# Altium PCB LED_Ring.PcbDoc
Units mm, origin at the board's own origin, x right, y up, seen from the top; angles counter-clockwise.
Board outline 152.4 x 101.6 mm, 2 copper layers (Top Layer, Bottom Layer); 55 components, 28 nets, 136 pads, 70 vias.
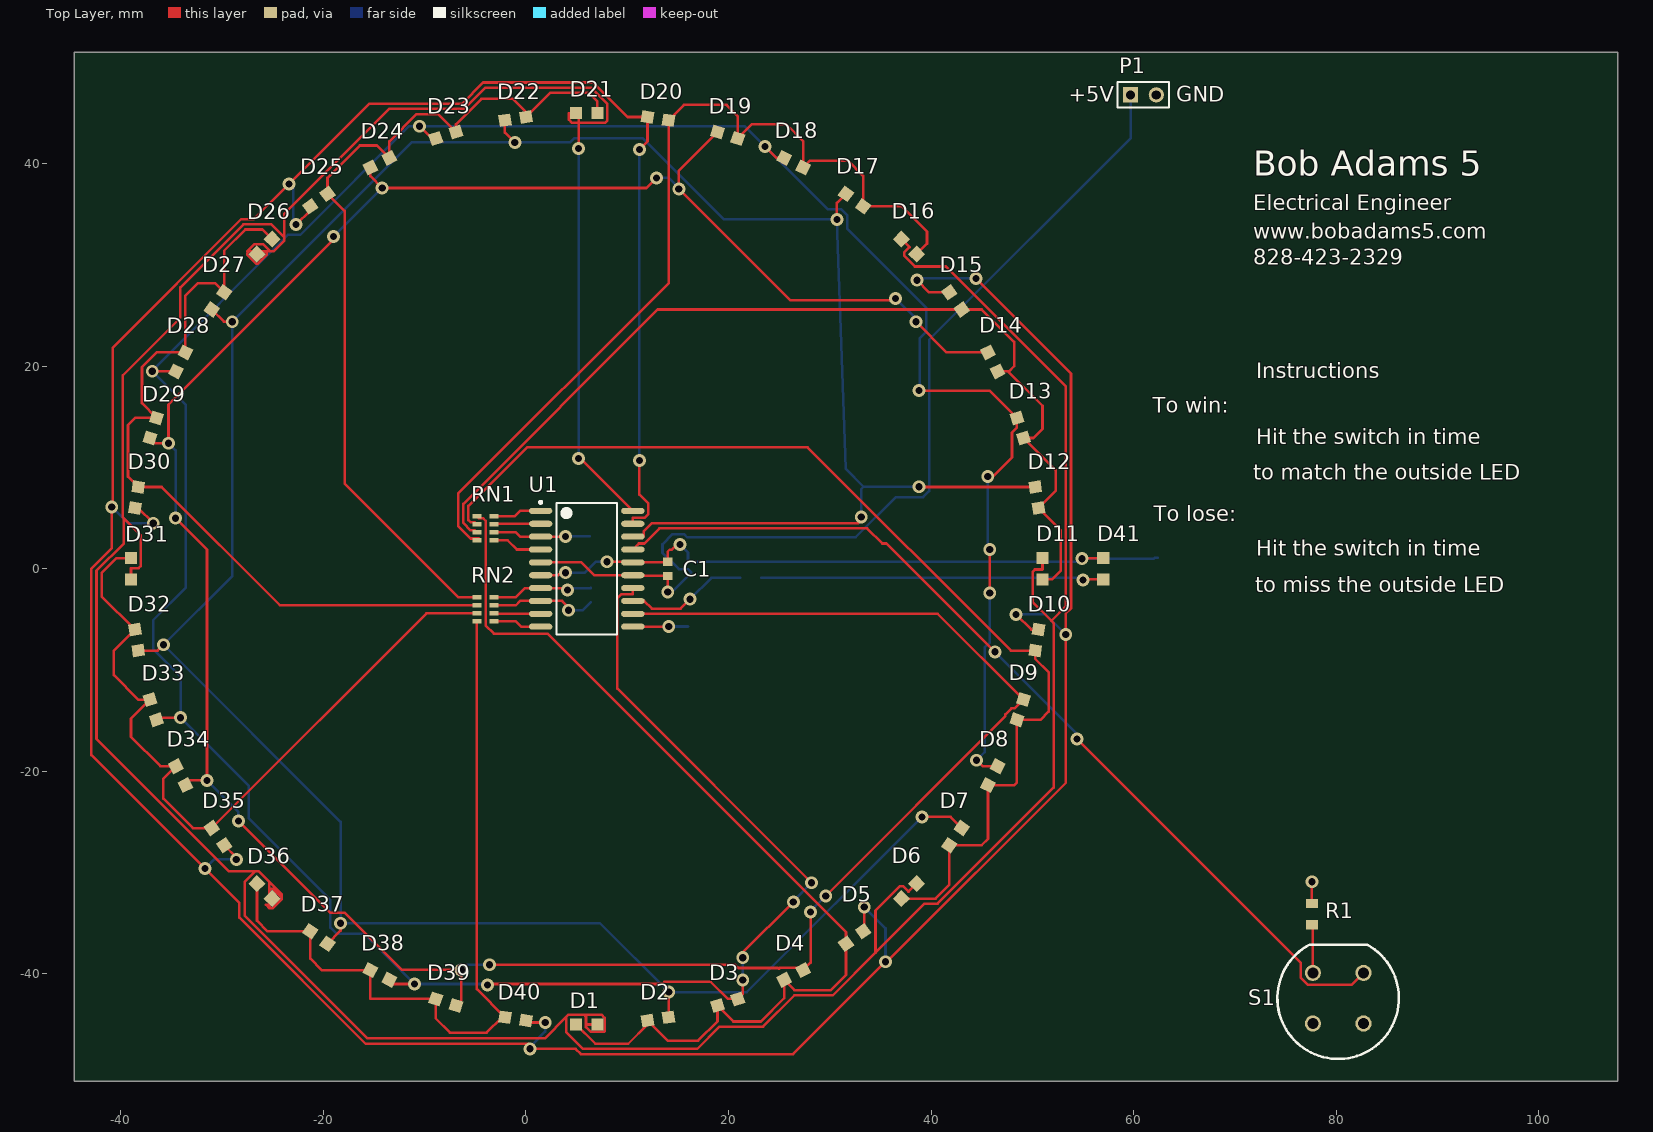
[diagram p0: Top Layer view]
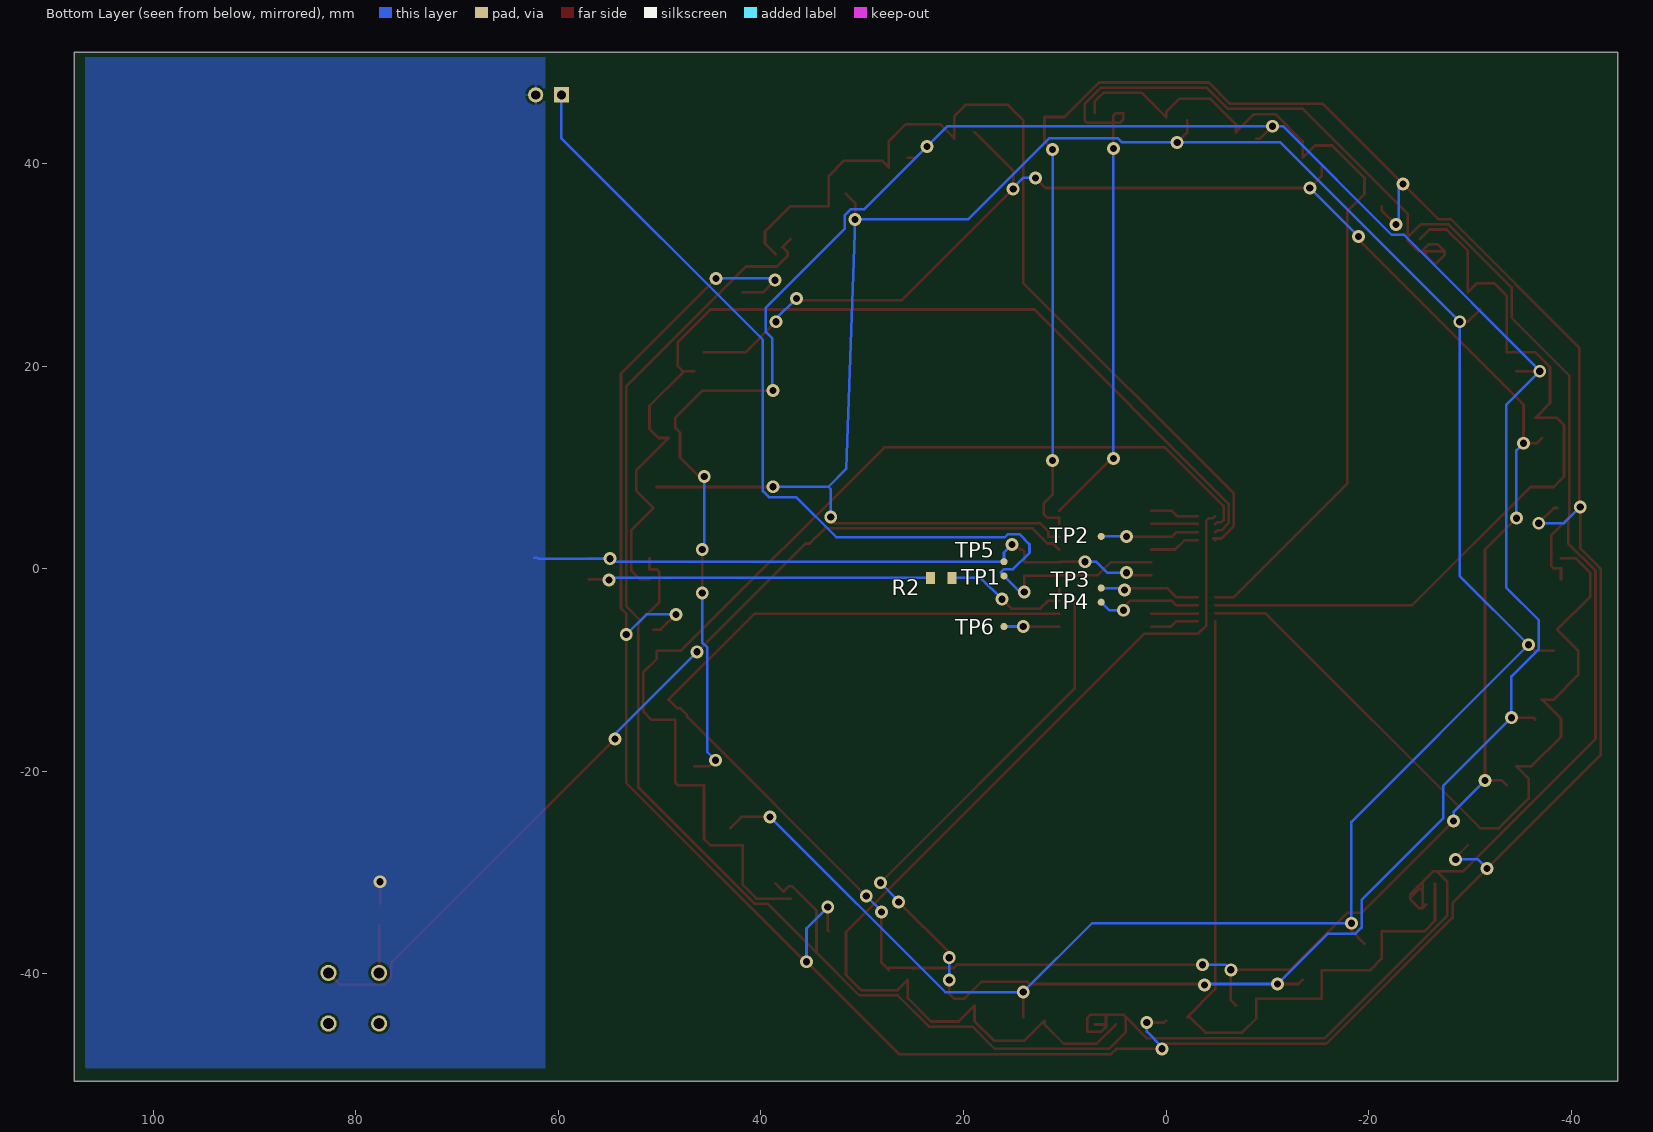
[diagram p1: Bottom Layer view, seen from below]

## Layer stack, top to bottom
Top Solder: solder mask 0.0102, Solder Resist, Dk 3.5
Top Layer: signal copper 0.0356
Dielectric 1: dielectric 0.32, FR-4, Dk 4.8
Bottom Layer: signal copper 0.0356
Bottom Solder: solder mask 0.0102, Solder Resist, Dk 3.5

## Board outline
-44.6,-50.6 107.8,-50.6 107.8,51 -44.6,51

## Design rules (kind name [scope] priority, off if disabled: settings)
Clearance [All] p1: gap=0.254
PolygonConnect [All] p1: connectstyle=Relief reliefconductorwidth=0.254 reliefentries=4 polygonreliefangle="90 Angle" airgapwidth=0.254
RoutingVias [All] p1: holewidth=0.711 width=1.27 viastyle="Through Hole" minholewidth=0.711 minwidth=1.27 maxholewidth=0.711 maxwidth=1.27
SolderMaskExpansion [All] p1: expansion=0.102
Width [All] p1: maxlimit=0.254 minlimit=0.254 preferedwidth=0.254
30 further rules are at their usual default settings.

## Components (designator, comment, footprint, x,y, rotation, side; value= is the part's Value field where it differs from the comment)
C1 "Cap Semi" 1608[0603] 14,0 r270 top
D1 "475-1410-1-ND" 0805 6,-45 r0 top
D2 "475-1410-1-ND" 0805 13.04,-44.45 r9 top
D3 "475-1410-1-ND" 0805 19.91,-42.8 r18 top
D4 "475-1410-1-ND" 0805 26.43,-40.1 r27 top
D5 "475-1410-1-ND" 0805 32.45,-36.41 r36 top
D6 "475-1410-1-ND" 0805 37.82,-31.82 r45 top
D7 "475-1410-1-ND" 0805 42.41,-26.45 r54 top
D8 "475-1410-1-ND" 0805 46.1,-20.43 r63 top
D9 "475-1410-1-ND" 0805 48.8,-13.91 r72 top
D10 "475-1410-1-ND" 0805 50.45,-7.04 r81 top
D11 "475-1410-1-ND" 0805 51,0 r90 top
D12 "475-1410-1-ND" 0805 50.45,7.04 r99 top
D13 "475-1410-1-ND" 0805 48.8,13.91 r108 top
D14 "475-1410-1-ND" 0805 46.1,20.43 r117 top
D15 "475-1410-1-ND" 0805 42.41,26.45 r126 top
D16 "475-1410-1-ND" 0805 37.82,31.82 r135 top
D17 "475-1410-1-ND" 0805 32.45,36.41 r144 top
D18 "475-1410-1-ND" 0805 26.43,40.1 r153 top
D19 "475-1410-1-ND" 0805 19.91,42.8 r162 top
D20 "475-1410-1-ND" 0805 13.04,44.45 r171 top
D21 "475-1410-1-ND" 0805 6,45 r180 top
D22 "475-1410-1-ND" 0805 -1.04,44.45 r189 top
D23 "475-1410-1-ND" 0805 -7.91,42.8 r198 top
D24 "475-1410-1-ND" 0805 -14.43,40.1 r207 top
D25 "475-1410-1-ND" 0805 -20.45,36.41 r216 top
D26 "475-1410-1-ND" 0805 -25.82,31.82 r225 top
D27 "475-1410-1-ND" 0805 -30.41,26.45 r234 top
D28 "475-1410-1-ND" 0805 -34.1,20.43 r243 top
D29 "475-1410-1-ND" 0805 -36.8,13.91 r252 top
D30 "475-1410-1-ND" 0805 -38.45,7.04 r261 top
D31 "475-1410-1-ND" 0805 -39,0 r270 top
D32 "475-1410-1-ND" 0805 -38.45,-7.04 r279 top
D33 "475-1410-1-ND" 0805 -36.8,-13.91 r288 top
D34 "475-1410-1-ND" 0805 -34.1,-20.43 r297 top
D35 "475-1410-1-ND" 0805 -30.41,-26.45 r306 top
D36 "475-1410-1-ND" 0805 -25.82,-31.82 r315 top
D37 "475-1410-1-ND" 0805 -20.45,-36.41 r324 top
D38 "475-1410-1-ND" 0805 -14.43,-40.1 r333 top
D39 "475-1410-1-ND" 0805 -7.91,-42.8 r342 top
D40 "475-1410-1-ND" 0805 -1.04,-44.45 r351 top
D41 "475-1410-1-ND" 0805 57,0 r90 top
P1 "Header 2" HDR1X2 59.7,46.8 r0 top
R1 "1k" RC0805 77.6,-34.1 r270 top
R2 "27" RC0805 22.2,-0.9 r180 bottom
RN1 "YC164J-27CT-ND" 4X0603 -4,4 r270 top
RN2 "YC164J-27CT-ND" 4X0603 -4,-4 r270 top
S1 "OFF-MOM switch, 10mA" EG4793-ND 80.2,-42.4 r0 top
TP1 "TP" TP 16,-0.7 r90 bottom
TP2 "TP" TP 6.4,3.2 r90 bottom
TP3 "TP" TP 6.4,-1.9 r90 bottom
TP4 "TP" TP 6.4,-3.3 r90 bottom
TP5 "TP" TP 16,0.7 r90 bottom
TP6 "TP" TP 16,-5.7 r90 bottom
U1 "ATtiny167-SU" 20S2_N 6,0 r0 top

## Footprints (in the part's own frame and the unit in brackets; to place one, negate y for a bottom-side part, rotate by r counter-clockwise, add the part's x,y. Pads: shape width x height; smd on the part's side, far side on the other; paste and mask are expansions set on the pad)
4X0603 [mm] "Based on Yageo 4x0603 Resistor Network"
  rect 0.45x0.9 smd: 1(-1.2,0.85) 2(-1.2,-0.85) 3(-0.4,0.85) 4(-0.4,-0.85) 5(0.4,0.85) 6(0.4,-0.85) 7(1.2,0.85) 8(1.2,-0.85)
20S2_N [mm] "SOIC, 20-Leads, Body 12.8x7.5mm, Pitch 1.27mm, IPC Medium Density"
  oval 2.3x0.6 smd: 1(-4.55,5.715) 2(-4.55,4.445) 3(-4.55,3.175) 4(-4.55,1.905) 5(-4.55,0.635) 6(-4.55,-0.635) 7(-4.55,-1.905) 8(-4.55,-3.175) 9(-4.55,-4.445) 10(-4.55,-5.715) 11(4.55,-5.715) 12(4.55,-4.445) 13(4.55,-3.175) 14(4.55,-1.905) 15(4.55,-0.635) 16(4.55,0.635) 17(4.55,1.905) 18(4.55,3.175) 19(4.55,4.445) 20(4.55,5.715)
  silkscreen extent -4.67,-6.5 3,6.69, body extent -3.8,-6.5 3.8,6.5, height 2.65
0805 [mil] "OSRAM 0805 LED, Body 2.1x1.35mm"
  rect 47x47 smd: 1(-41.34,0) 2(41.34,0)
1608[0603] [mm] "Chip Capacitor, Body 1.6x0.8mm, IPC High Density"
  rect 0.8x0.9 smd: 1(-0.7,0) 2(0.7,0)
  body extent -0.87,-0.48 0.87,0.48, height 1.3
EG4793-ND [mm] "Green circular button, through hole, Off-MOM"
  round 1.6 hole 1.1: 1(2.5,2.5) 2(-2.5,2.5) 3(2.5,-2.5) 4(-2.5,-2.5)
  silkscreen extent -6,-6 6,5.3
HDR1X2 [mm] "Connector; Header; 2 Position"
  rect 1.5x1.5 hole 0.9: 1(0,0)
  round 1.5 hole 0.9: 2(2.54,0)
  silkscreen extent -1.27,-1.27 3.81,1.27
RC0805 [mm]
  rect 0.9x1.2 smd: 1(-1.05,0) 2(1.05,0)
  body extent -1,-0.63 1,0.62, height 0.5
TP [mm] "0.7mm test point for"
  round 0.7 smd: 1(0,0)

## Part data
C1: "Capacitor (Semiconductor SIM Model)"
D1 D2 D3 D4 D5 D6 D7 D8 D9 D10 D11 D12 D13 D14 D15 D16 D17 D18 D19 D20 D21 D22 D23 D24 D25 D26 D27 D28 D29 D30 D31 D32 D33 D34 D35 D36 D37 D38 D39 D40 D41: "OSRAM LG R971-KN-1, 0805, Green"
P1: "Header, 2-Pin"
R1: library part RC0805FR-071KL, "RES SMD 1K OHM 1% 1/8W 0805"
R2: library part RC0805FR-0727RL, "RES SMD 27 OHM 1% 1/8W 0805"
RN1 RN2: "Resistor Network"
S1: "EG4793-ND"
U1: "8-bit AVR Microcontroller, LIN Controller, 1.8-5.5V, 20MHz, 16KB Flash, 512 Bytes EEPROM, 512 Bytes SRAM, 20-pin SOIC, Industrial Grade (-40°C to 85°C)"

## Via types
v1: diameter 1.27, hole 0.711, Top Layer to Bottom Layer, 70 vias

## Nets (pads, with @x,y where several pads share a name; then routed paths per layer and width w, separated by ;. In a path a pad name is that pad's centre, name@x,y a point inside that pad or via, vN(x,y) a via of type N, cw(c..) or ccw(c..) an arc to the next point about the centre after c; other vN are vias at no path point)
GND: C1.1 D41.2 P1.2 R1.1 TP5.1 U1.6 U1.16 | length 68.5
  Top Layer w0.254: U1.6 3.165,-0.635 3.5,-0.3 3.819,-0.3 v1(3.9,-0.381) ; v1(8,0.7) 10.485,0.7 U1.16 C1.1@13.935,0.635 ; C1.1 14,1.7 14.2,1.9 14.4,1.9 14.9,2.4 v1(15.2,2.4) ; v1(54.9,1) 54.95,1.05 D41.2 ; R1.1 v1(77.6,-30.9)
  Bottom Layer w0.254: v1(3.9,-0.381) 5.819,-0.381 6.9,0.7 v1(8,0.7) ; v1(15.2,2.4) 16,1.6 TP5.1 54.6,0.7 v1(54.9,1) 62,1 62.1,1.1 62.4,1.1
GPIO_1: D1.1 D2.1 D3.1 D4.1 D5.1 RN1.2 | length 100
  Top Layer w0.254: RN1.2 -4.656,5.006 -4.242,5.006 -3.981,4.745 -3.981,-5.583 -3.168,-6.396 2.115,-6.396 31.601,-35.882 D5.1 31.601,-40.099 30.1,-41.6 26.518,-41.6 D4.1 25.494,-42.406 23.2,-44.7 20.487,-44.7 D3.1 18.911,-44.689 17,-46.6 13.989,-46.6 D2.1 12.003,-44.997 10.1,-46.9 6.85,-46.9 D1.1
GPIO_2: D6.1 D7.1 D8.1 D9.1 D10.1 RN1.4 | length 106.8
  Top Layer w0.254: RN1.4 -5.044,4.594 -5.458,4.594 -5.681,4.817 -5.681,6.201 0.109,11.991 27.809,11.991 47.877,-8.077 D10.1 50.286,-8.886 51.6,-10.2 51.6,-14.1 50.791,-14.909 D9.1 48.476,-21.124 48.234,-21.366 D8.1 45.623,-26.677 45.001,-27.299 D7.1 41.793,-31.207 40.438,-32.562 D6.1
GPIO_3: D11.1 D12.1 D13.1 D14.1 D15.1 RN1.6 | length 99
  Top Layer w0.254: RN1.6 -5.044,3.794 -5.458,3.794 -6.189,4.525 -6.189,6.411 13.001,25.601 D15.1 44.999,25.601 48.2,22.4 48.2,20 47.694,19.494 47.606,19.494 ; D14.1 47.606,19.494 ; D11.1 51.95,-1.05 52.8,-0.2 52.8,3.817 D12.1 52.3,7.689 52.3,9.736 D13.1 50.111,12.911 51,13.8 51,16.1 47.606,19.494
GPIO_4: D16.1 D17.1 D18.1 D19.1 D20.1 RN1.8 | length 91.8
  Top Layer w0.254: RN1.8 -4.656,2.994 -5.458,2.994 -6.697,4.233 -6.697,7.412 14.077,28.186 D20.1 15.591,45.8 19.8,45.8 20.909,44.691 D19.1 22.333,43.9 25.7,43.9 27.366,42.234 D18.1 28.042,40.3 31.8,40.3 33.299,38.801 D17.1 37.107,35.793 39.6,33.3 39.6,32.115 D16.1
GPIO_5: D21.1 D22.1 D23.1 D24.1 D25.1 RN2.2 | length 85.9
  Top Layer w0.254: RN2.2 -6.7,-2.8 -17.9,8.4 -17.9,35.327 D25.1 -19.601,38.599 -16.4,41.8 -14.718,41.8 D24.1 -13.494,42.206 -10.8,44.9 -8.687,44.9 D23.1 -6.911,43.889 -4.4,46.4 -1.3,46.4 -0.003,45.103 D22.1 2.383,47 6.2,47 7.05,46.15 D21.1
GPIO_6: D26.1 D27.1 D28.1 D29.1 D30.1 RN2.4 | length 78.8
  Top Layer w0.254: D26.1 -26.015,33.5 -27.7,33.5 -29.793,31.407 D27.1 -30.693,28.2 -32.4,28.2 -33.623,26.977 D28.1 -36.471,21.366 -37.916,19.921 -37.916,16.349 D29.1 -38.591,14.909 -39.3,14.2 -39.3,9.091 D30.1 -35.977,8.077 -24.3,-3.6 RN2.4
GPIO_7: D31.1 D32.1 D33.1 D34.1 D35.1 RN2.6 | length 75.1
  Top Layer w0.254: D31.1 -40.45,1.05 -41.9,-0.4 -41.9,-2.717 D32.1 -40.7,-8.089 -40.7,-10.5 -38.289,-12.911 D33.1 -39,-14.787 -39,-16.6 -36.106,-19.494 D34.1 -35.8,-20.718 -35.8,-22.7 -32.899,-25.601 D35.1 -9.827,-4.4 RN2.6
GPIO_8: D36.1 D37.1 D38.1 D39.1 D40.1 RN2.8 | length 77.9
  Top Layer w0.254: D36.1 -26.562,-34.738 -25.507,-35.793 D37.1 -21.299,-38.501 -20.177,-39.623 D38.1 -15.366,-42.434 -15.324,-42.476 D39.1 -8.909,-44.391 -7.5,-45.8 -3.9,-45.8 -2.386,-44.286 D40.1 -4.85,-41.513 RN2.8
INPUT_SW: S1.1 U1.17 | length 93.3
  Top Layer w0.254: U1.17 11.139,2.494 11.682,2.494 13.188,4 33.687,4 35.187,2.5 35.6,2.5 v1(46.3,-8.2) ; v1(54.4,-16.8) 76.519,-38.919 76.519,-40.389 77.211,-41.081 81.519,-41.081 S1.1
  Bottom Layer w0.254: v1(46.3,-8.2) 54.4,-16.3 v1(54.4,-16.8)
NetD41_1: D41.1 R2.1 | length 33.9
  Top Layer w0.254: v1(55,-1.1) 55.05,-1.05 D41.1
  Bottom Layer w0.254: R2.1 54.8,-0.9 v1(55,-1.1)
NetR1_2: R1.2 S1.2 | length 4.8
  Top Layer w0.254: R1.2 77.7,-35.25 S1.2
NetR2_2: R2.2 U1.13 | length 12.2
  Top Layer w0.254: U1.13 11.675,-3.175 12.437,-3.937 15.263,-3.937 v1(16.2,-3)
  Bottom Layer w0.254: v1(16.2,-3) 18.3,-0.9 R2.2
NetRN1_1: RN1.1 U1.1 | length 4.8
  Top Layer w0.254: RN1.1 -1.1,5.2 -0.585,5.715 U1.1
NetRN1_3: RN1.3 U1.2 | length 4.6
  Top Layer w0.254: RN1.3 -3.105,4.445 U1.2
NetRN1_5: RN1.5 TP2.1 U1.3 | length 9.6
  Top Layer w0.254: RN1.5 -1,3.6 -0.575,3.175 U1.3 v1@3.575,3.175
  Bottom Layer w0.254: v1@3.575,3.175 3.6,3.2 TP2.1@6.3,3.2
  other v1: 3.9,3.175
NetRN1_7: RN1.7 U1.4 | length 5
  Top Layer w0.254: RN1.7 -1.8,2.8 -0.905,1.905 U1.4
NetRN2_1: RN2.1 TP3.1 U1.7 | length 9.9
  Top Layer w0.254: RN2.1 -1,-2.8 -0.105,-1.905 U1.7 v1@3.995,-1.905
  Bottom Layer w0.254: v1@3.995,-1.905 6.395,-1.905 TP3.1
  other v1: 4.1,-2.1
NetRN2_3: RN2.3 TP4.1 U1.8 | length 11.1
  Top Layer w0.254: RN2.3 -1,-3.6 -0.575,-3.175 U1.8 3.575,-3.175 4.2,-3.8 v1(4.2,-4.1)
  Bottom Layer w0.254: v1@4.2,-3.6 v1(4.2,-4.1) 5.6,-4.1 TP4.1
NetRN2_5: RN2.5 U1.9 | length 4.6
  Top Layer w0.254: RN2.5 -3.105,-4.445 U1.9
NetRN2_7: RN2.7 U1.10 | length 4.8
  Top Layer w0.254: RN2.7 -1,-5.2 -0.485,-5.715 U1.10
NetTP6_1: TP6.1 U1.11 | length 5.5
  Top Layer w0.254: U1.11 14.085,-5.715 v1(14.1,-5.7)
  Bottom Layer w0.254: v1(14.1,-5.7) TP6.1
PWM1: D1.2 D6.2 D11.2 D16.2 D21.2 D26.2 D31.2 D36.2 U1.20 | length 395.6
  Top Layer w0.254: D31.2 -39,0.072 -38.245,0.072 -38.022,0.295 -38.022,3.283 -39.7,4.961 ; v1(5.2,10.9) 5.2,11.065 U1.20 ; v1(5.2,41.5) 5.2,44.022 ; D1.2 5.928,-45 ; D16.2 37.871,31.769 37.337,31.235 37.337,30.92 38.405,29.852 41.466,29.852 53.308,18.01 53.308,-3.692 51.87,-5.13 ; D6.2 37.769,-31.871 37.235,-31.337 36.92,-31.337 34.514,-33.743 34.514,-37.904 ; D11.2 51,-0.072 50.245,-0.072 50.022,-0.295 50.022,-3.283 51.87,-5.13 ; -39.7,4.961 -39.808,5.069 -39.808,19.11 -34.131,24.787 -34.131,27.787 -27.91,34.008 -25.14,34.008 -23.852,32.72 ; -39.7,4.961 -39.7,2.518 -42.408,-0.19 -42.408,-16.81 -29.366,-29.852 -26.72,-29.852 ; -27.326,31.337 -27.534,31.337 -26.822,32.049 -25.947,32.049 -25.769,31.871 -25.235,31.337 ; -27.326,31.337 -25.798,31.337 ; -27.326,31.337 -27.534,31.13 -27.534,31.025 -26.615,30.106 -26.51,30.106 -25.591,31.025 -25.591,31.13 -25.798,31.337 ; -26.72,-29.852 -26.405,-29.852 -25.337,-30.92 ; -26.72,-29.852 -27.788,-30.92 -27.788,-34.231 -15.658,-46.361 1.857,-46.361 3.972,-44.245 ; -25.798,31.337 -25.235,31.337 ; -25.337,-33.164 -25.337,-33.326 -25.13,-33.534 ; -25.337,-33.164 -25.337,-31.798 ; -25.337,-33.164 -25.685,-33.164 -25.315,-33.534 -25.13,-33.534 ; -25.337,-31.798 -25.337,-30.92 ; -25.337,-31.798 -25.13,-31.591 -25.025,-31.591 -24.106,-32.51 ; -25.337,-30.92 -24.106,-32.151 -24.106,-32.51 ; -25.235,31.337 -24.92,31.337 -23.852,32.405 -23.852,32.72 ; -25.13,-33.534 -25.025,-33.534 -24.106,-32.615 -24.106,-32.51 ; -23.852,32.72 -23.852,35.066 -13.51,45.408 -6.11,45.408 -4.01,47.508 6.41,47.508 8.028,45.891 8.028,44.245 7.805,44.022 5.2,44.022 ; 3.972,-44.245 3.972,-45.755 5.625,-47.408 16.91,-47.408 19.11,-45.208 23.41,-45.208 26.51,-42.108 30.31,-42.108 34.514,-37.904 ; 3.972,-44.245 4.195,-44.022 5.705,-44.022 ; 5.2,44.022 4.554,44.022 4.226,44.351 4.226,45 D21.2 5.2,44.75 5.2,44.022 ; 5.705,-44.022 7.446,-44.022 7.774,-44.351 7.774,-45.65 7.7,-45.724 6.401,-45.724 5.928,-45.251 5.928,-45 ; 5.705,-44.022 5.928,-44.245 5.928,-45 ; 34.514,-37.904 39.348,-33.07 40.648,-33.07 52.108,-21.61 52.108,-5.369 51.87,-5.13
  Bottom Layer w0.254: v1(5.2,10.9) v1(5.2,41.5)
PWM2: D2.2 D7.2 D12.2 D17.2 D22.2 D27.2 D32.2 D37.2 U1.18 | length 298.6
  Top Layer w0.254: D32.2 -36.377,-8.077 v1(-35.8,-7.5) ; D27.2 -29.827,24.4 v1(-29,24.4) ; D37.2 -18.3,-35.727 v1(-18.3,-35) ; D22.2 -2.077,43.077 v1(-1.1,42.1) ; U1.18 11.645,3.175 11.645,3.727 12.426,4.508 32.808,4.508 33.1,4.8 v1(33.1,5.1) ; D2.2 14.1,-44.263 v1(14.1,-41.8) ; v1(30.7,34.5) 30.7,36.127 D17.2 ; v1(38.8,8.1) 38.823,8.077 D12.2 ; v1(39.1,-24.5) 41.927,-24.5 D7.2
  Bottom Layer w0.254: v1(33.1,5.1) 33.1,7.856 33.344,8.1 ; v1(38.8,8.1) 33.344,8.1 ; v1(39.1,-24.5) 21.8,-41.8 v1(14.1,-41.8) 7.3,-35 v1(-18.3,-35) -18.3,-25 v1(-35.8,-7.5) -29,-0.7 v1(-29,24.4) -11.3,42.1 v1(-1.1,42.1) 4.363,42.1 4.779,42.516 11.521,42.516 19.537,34.5 v1(30.7,34.5) 31.562,9.883 33.344,8.1
PWM3: D3.2 D8.2 D13.2 D18.2 D23.2 D28.2 D33.2 D38.2 U1.14 | length 325.3
  Top Layer w0.254: v1(-36.9,19.5) -36.894,19.494 D28.2 ; D33.2 -36.267,-14.7 v1(-34.1,-14.7) ; D38.2 -13.071,-41 v1(-11,-41) ; v1(-10.5,43.7) -9.276,42.476 D23.2 ; v1(-3.8,-41.1) -3.7,-41 13.463,-41 13.679,-40.784 18.245,-40.784 19.937,-42.476 D3.2 21.4,-41.984 v1(21.4,-40.6) ; U1.14 10.55,-2.494 9.418,-2.494 9.019,-2.893 9.019,-11.819 v1(28.2,-31) ; v1(21.4,-38.4) 21.4,-37.9 v1(26.4,-32.9) ; v1(23.6,41.7) 24.723,40.577 D18.2 ; v1(38.8,17.6) 45.784,17.6 D13.2 48.476,13.937 47.991,13.452 47.991,10.991 46.1,9.1 v1(45.6,9.1) ; v1(44.5,-18.9) 45.094,-19.494 D8.2 ; v1(45.8,-2.4) v1(45.8,1.9)
  Bottom Layer w0.254: v1(-3.8,-41.1) -3.9,-41 v1(-11,-41) -15.984,-36.016 -18.721,-36.016 -19.316,-35.421 -19.316,-32.684 -27.384,-24.616 -27.384,-21.416 v1(-34.1,-14.7) -34.1,-10.637 -36.816,-7.921 -36.816,-5.082 -33.584,-1.85 -33.584,16.184 -36.95,19.55 -23.516,32.984 -22.279,32.984 -11.563,43.7 v1(-10.5,43.7) 21.6,43.7 v1(23.6,41.7) 29.784,35.516 31.121,35.516 31.716,34.921 31.716,33.584 39.516,25.784 39.516,23.384 38.9,22.768 38.9,17.7 v1(38.8,17.6) ; v1(21.4,-40.6) v1(21.4,-38.4) ; v1(26.4,-32.9) 26.4,-32.8 v1(28.2,-31) ; v1(44.5,-18.9) 45.284,-18.116 45.284,-7.779 45.8,-7.263 v1(45.8,-2.4) ; v1(45.6,9.1) 45.6,2.1 v1(45.8,1.9)
PWM4: D4.2 D9.2 D14.2 D19.2 D24.2 D29.2 D34.2 D39.2 U1.12 | length 300.2
  Top Layer w0.254: D29.2 -36.613,12.4 v1(-35.3,12.4) -35.3,16.2 -19,32.5 v1(-19,32.8) ; v1(-34.6,5) -31.5,1.9 v1(-31.5,-20.9) -33.158,-20.9 D34.2 ; v1(-28.4,-24.9) -19.316,-33.984 -17.879,-33.984 -12.263,-39.6 v1(-6.4,-39.6) -6.4,-42.613 D39.2 ; D24.2 -15.366,38.766 v1(-14.2,37.6) 11.9,37.6 v1(12.9,38.6) ; v1(-3.6,-39.1) 20.663,-39.1 20.979,-39.416 24.885,-39.416 24.969,-39.5 25.076,-39.393 27.366,-39.393 D4.2 28.1,-38.889 v1(28.1,-33.9) ; U1.12 40.658,-4.445 D9.2 48.26,-13.775 47.934,-13.775 47.342,-14.368 47.342,-14.558 v1(29.6,-32.3) ; D19.2 15.093,39.306 v1(15.093,37.507) 26.1,26.5 36.3,26.5 v1(36.5,26.7) ; v1(38.5,24.4) 41.534,21.366 D14.2
  Bottom Layer w0.254: v1(-35.3,12.4) -34.6,11.7 v1(-34.6,5) ; v1(-31.5,-20.9) -28.4,-24 v1(-28.4,-24.9) ; v1(-19,32.8) v1(-14.2,37.6) ; v1(-6.4,-39.6) -5.9,-39.1 v1(-3.6,-39.1) ; v1(12.9,38.6) 14.1,38.6 15.093,37.607 v1(15.093,37.507) ; v1(28.1,-33.9) 28.1,-33.8 v1(29.6,-32.3) ; v1(36.5,26.7) 38.5,24.7 v1(38.5,24.4)
PWM5: D5.2 D10.2 D15.2 D20.2 D25.2 D30.2 D35.2 D40.2 U1.19 | length 374.1
  Top Layer w0.254: D30.2 -38.303,6.003 v1(-36.8,4.5) ; D35.2 -28.6,-28.492 v1(-28.6,-28.7) ; v1(-22.7,34) -21.299,35.401 D25.2 ; D40.2 0.183,-44.8 v1(1.9,-44.8) ; U1.19 10.55,5.034 11.682,5.034 12.081,5.433 12.081,6.433 11.2,7.314 v1(11.2,10.7) ; v1(11.2,41.4) 12.003,42.203 D20.2 10.023,44.614 6.621,48.016 -4.221,48.016 -6.321,45.916 -15.484,45.916 v1(-23.4,38) -26.884,34.516 -28.121,34.516 -40.8,21.837 -40.8,6.2 v1(-40.9,6.1) -40.9,2.037 -42.916,0.021 -42.916,-18.384 v1(-31.7,-29.6) -28.296,-33.004 -28.296,-34.441 -15.837,-46.9 0.2,-46.9 0.4,-47.1 v1(0.4,-47.4) 4.899,-47.4 5.415,-47.916 26.384,-47.916 v1(35.5,-38.8) 35.637,-38.8 53.3,-21.137 v1(53.3,-6.5) 53.3,-4.418 53.816,-3.902 53.816,19.284 v1(44.432,28.668) ; D5.2 33.4,-35.692 v1(33.4,-33.4) ; v1(38.6,28.5) 39.801,27.299 D15.2 ; v1(48.4,-4.5) 49.903,-6.003 D10.2
  Bottom Layer w0.254: v1(-40.9,6.1) -39.3,4.5 v1(-36.8,4.5) ; v1(-31.7,-29.6) -30.8,-28.7 v1(-28.6,-28.7) ; v1(-23.4,38) -23,37.6 -23,34.3 v1(-22.7,34) ; v1(0.4,-47.4) 0.4,-47.2 1.9,-45.7 v1(1.9,-44.8) ; v1(11.2,10.7) v1(11.2,41.4) ; v1(33.4,-33.4) 35.5,-35.5 v1(35.5,-38.8) ; v1(38.6,28.5) 38.768,28.668 v1(44.432,28.668) ; v1(48.4,-4.5) 51.3,-4.5 v1(53.3,-6.5)
VCC: C1.2 P1.1 TP1.1 U1.5 U1.15 | length 98.5
  Top Layer w0.254: U1.5 5.465,0.635 6.735,-0.635 U1.15 10.615,-0.7 C1.2 v1(14,-2.3)
  Bottom Layer w0.254: v1(14,-2.3) 14.4,-2.3 TP1.1 16.337,-0.363 16.006,-0.031 15.094,-0.031 13.484,1.579 13.484,2.421 14.479,3.416 15.621,3.416 15.921,3.116 32.553,3.116 36.521,7.084 39.221,7.084 39.816,7.679 39.816,22.616 59.7,42.5 P1.1
pads on no net: S1.3 S1.4

## Polygon pours and split planes (outlines as drawn)
GND on Bottom Layer "GND Fill" (solid, pour order 3): 61,50.5 106.7,50.5 106.7,-49.2 106.6,-49.3 61.3,-49.3 61.3,50.5

## Silkscreen, mask and mechanical layers (free items; w line width, h text height)
Top Overlay:
  text "+5V" at 53.6,46.1 h1.52
  text "GND" at 64.2,46.1 h1.52
  text "Bob Adams 5" at 71.8,38.8 h2.5
  text "Electrical Engineer" at 71.8,35.4 h1.52
  text "www.bobadams5.com" at 71.8,32.6 h1.52
  text "828-423-2329" at 71.8,30 h1.52
  text "Instructions" at 72.1,18.8 h1.52
  text "To win:" at 61.9,15.4 h1.52
  text "Hit the switch in time" at 72.1,12.3 h1.52
  text "to match the outside LED" at 71.8,8.8 h1.52
  text "To lose:" at 62,4.7 h1.52
  text "Hit the switch in time" at 72.1,1.3 h1.52
  text "to miss the outside LED" at 72,-2.3 h1.52
Mechanical 1:
  the board outline again, w0.254